# Altium PCB CH32F&V208R-R0-1v1.PcbDoc (part 1 of 3)
Units mil, origin at the board's own origin, x right, y up, seen from the top; angles counter-clockwise.
Board outline 3405.51 x 3740.16 mil, 2 copper layers (Top Layer, Bottom Layer); 61 components, 89 nets, 339 pads, 976 vias.
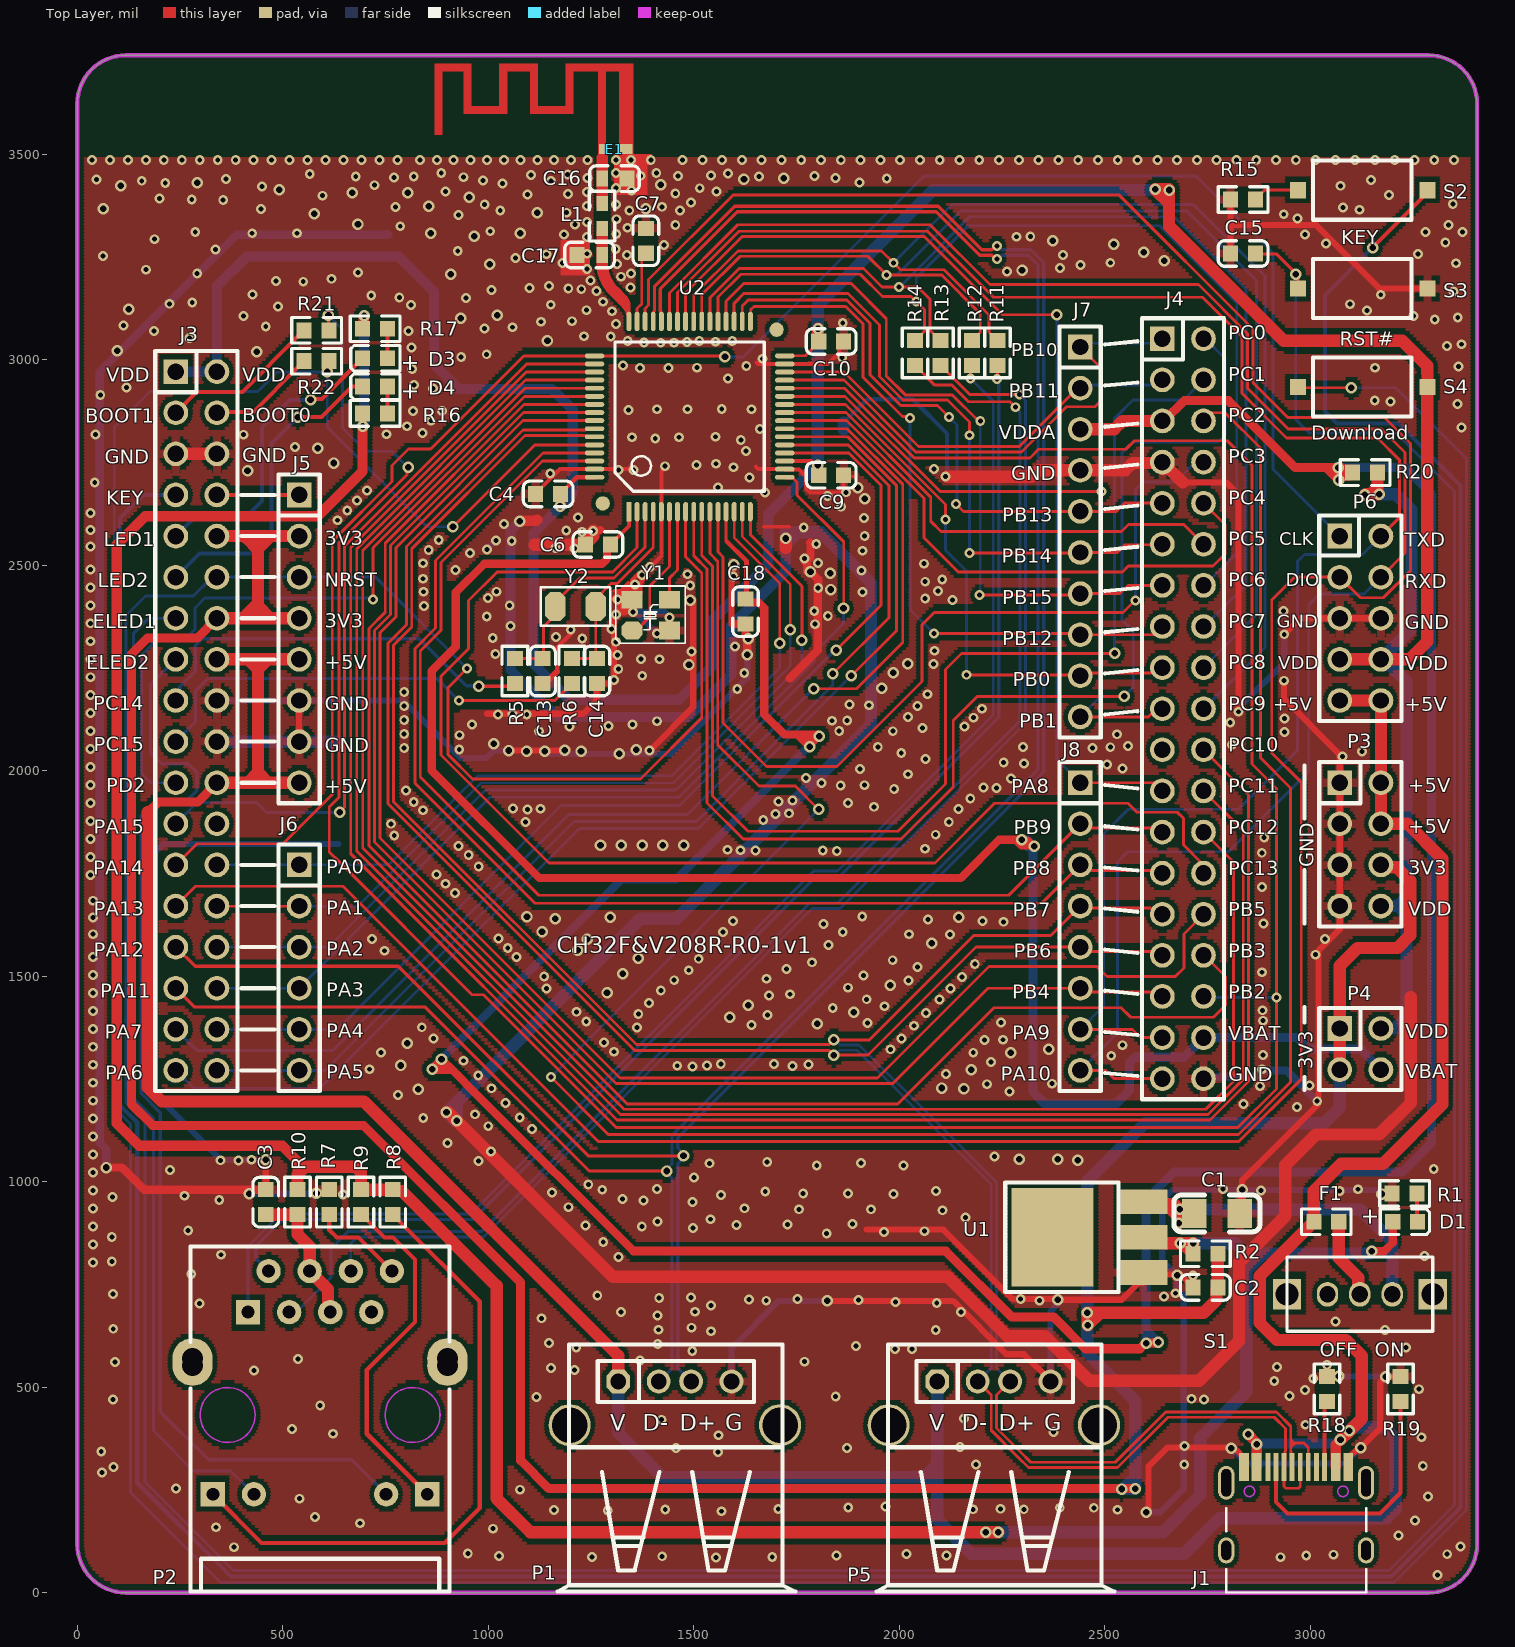
[diagram p0: Top Layer view]
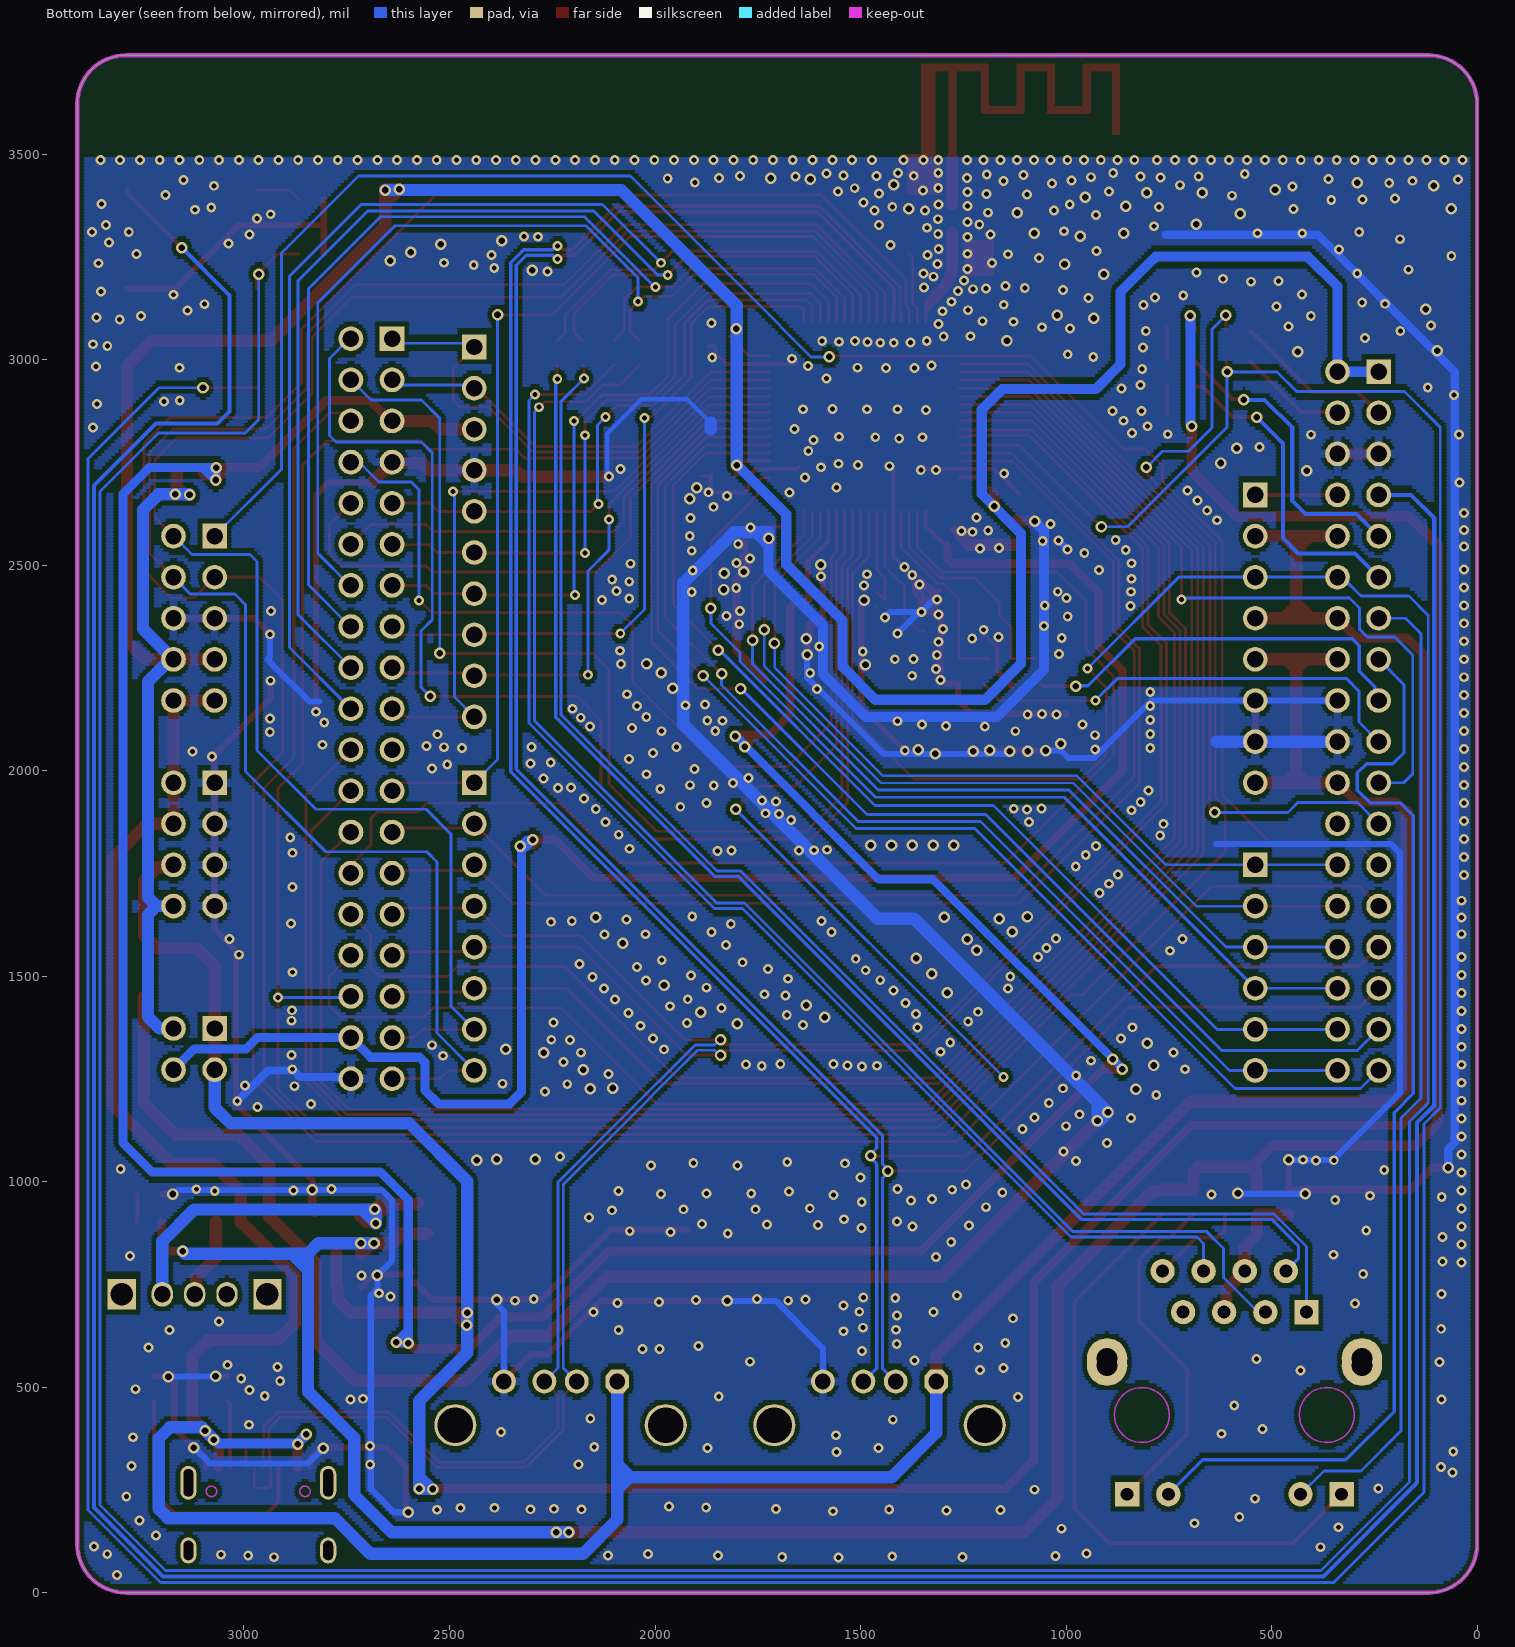
[diagram p1: Bottom Layer view, seen from below]

## Layer stack, top to bottom
Top Solder: solder mask 0.4, Solder Resist, Dk 3.5
Top Layer: signal copper 1.4
Dielectric 1: dielectric 12.6, FR-4, Dk 4.8
Bottom Layer: signal copper 1.4
Bottom Solder: solder mask 0.4, Solder Resist, Dk 3.5

## Board outline
0,118.11 ccw(c118.11,118.11) 118.11,0 3287.4,0 ccw(c3287.4,118.11) 3405.51,118.11 3405.51,3622.05 ccw(c3287.4,3622.05) 3287.4,3740.16 118.11,3740.16 ccw(c118.11,3622.05) 0,3622.05

## Design rules (kind name [scope] priority, off if disabled: settings)
Clearance Clearance_2 [InNet('ANT') or InNet('NetC16_2')] p1: gap=6 ignorepadtopadclearanceinfootprint=FALSE
Clearance Clearance_1 [InPolygon] p2: gap=10 ignorepadtopadclearanceinfootprint=FALSE
Clearance [All] p3: gap=6 ignorepadtopadclearanceinfootprint=FALSE except(8: Arc-Via Track-Via)
ComponentClearance [All] p1 off: gap=10 collisioncheckmode=3 verticalgap=10 showdistances=FALSE
DiffPairsRouting [All] p1: maxlimit=10 minlimit=6 mostfreqgap=6 toplayer_minwidth=5 toplayer_maxwidth=15 toplayer_prefwidth=8 bottomlayer_minwidth=5 bottomlayer_maxwidth=15 bottomlayer_prefwidth=8 maxuncoupledlength=500
MinimumSolderMaskSliver [All] p1 off: minsoldermaskwidth=10
PolygonConnect PolygonConnect_1 [IsVia] p1: connectstyle=Direct reliefconductorwidth=10 reliefentries=4 polygonreliefangle="90 Angle" airgapwidth=10
PolygonConnect [All] p2: connectstyle=Relief reliefconductorwidth=20 reliefentries=4 polygonreliefangle="90 Angle" airgapwidth=10
RoutingVias [All] p1: holewidth=16 width=28 viastyle="Through Hole" minholewidth=12 minwidth=24 maxholewidth=28 maxwidth=50
SilkToSilkClearance [All] p1 off: silktosilkclearance=10
SilkToSolderMaskClearance [IsPad] p1 off: minsilkscreentomaskgap=10 clearancetoexposedcopper=TRUE
SolderMaskExpansion [All] p1: expansion=4 istentingtop=FALSE
Width [All] p1: maxlimit=100 minlimit=6 preferedwidth=10
25 further rules are at their usual default settings.

## Classes and differential pairs
differential pair NewDifferentialPair2: +PB6 -PB7
differential pair NewDifferentialPair1: +PA11 -PA12

## Components (designator, comment, footprint, x,y, rotation, side; value= is the part's Value field where it differs from the comment)
C1 "10uF" 3216_C 2717.59,922.82 r180 top
C2 "10uF" 0603_C#1 2774.75,742.72 r180 top
C3 "1uF" 0603_C#1 458.47,980.52 r270 top
C4 "0.1uF" 0603_C#1 1175.75,2673.25 r180 top
C6 "0.1uF" 0603_C#1 1296.96,2550.22 r180 top
C7 "1uF" 0603_C#1 1383.28,3258.6 r90 top
C9 "0.1uF" 0603_C#1 1864.37,2718.39 r180 top
C10 "0.1uF" 0603_C#1 1864.37,3044.01 r180 top
C13 "12pF" 0603_C#1 1132.17,2212.01 r90 top
C14 "12pF" 0603_C#1 1264.31,2212.02 r90 top
C15 "0.1uF" 0603_C#1 2805.76,3258.02 r0 top
C16 "1.8pF" 0603_C#2 1337.26,3440.16 r180 top
C17 "1.8pF" 0603_C#2 1216.02,3254.21 r0 top
C18 "0.1uF" 0603_C#1 1625.64,2416.97 r270 top
D1 "power" 0603+ 3200.16,902.46 r0 top
D3 "RED" 0603+ 754.74,3003.01 r180 top
D4 "RED" 0603+ 754.74,2934.01 r180 top
E1 "ANTENNA" ANT-F-1-2.4G-1.6mmFR4 1276.83,3511.98 r0 top
F1 "500mA" 0603#1 3008.15,902.46 r0 top
J1 "TYPE-C-Receptacle-2.0" TYPE-C-Receptacle-2.0 2965.21,305.64 r0 top
J3 "Header 18X2" IDC36-2.54mm 239.76,2970.54 r0 top locked
J4 "Header 19X2" IDC38-2.54mm 2639.76,3050.54 r0 top
J5 "Header 8" SIP8-2.54mm 539.76,2670.54 r0 top locked
J6 "Header 6" SIP6-2.54MM 539.76,1770.54 r0 top locked
J7 "Header 10" SIP10-2.54mm 2439.76,3030.54 r0 top locked
J8 "Header 8" SIP8-2.54mm 2439.76,1970.54 r0 top locked
L1 "1.8nH" 0603#2 1276.63,3318.58 r90 top
P1 "USB" USBAF 1316.04,513.94 r0 top
P2 "HR911105A" HR911105A 415.37,682.53 r0 top
P3 "HEADER 4x2" IDC8-2.54mm 3071.43,1970.54 r0 top
P4 "Header 2X2" IDC4-2.54mm 3071.43,1372.54 r0 top
P5 "USB" USBAF 2092.04,513.94 r0 top
P6 "LINK" IDC10-2.54mm 3071.43,2170.53 r0 top
R1 "1K" 0603#1 3198.78,971.07 r0 top
R2 "0Ω" 0603#1 2774.75,824.53 r180 top
R5 "NC(0R)" 0603#1 1064.62,2212.01 r90 top
R6 "NC(0R)" 0603#1 1203.17,2212.01 r90 top
R7 "0Ω" 0603#1 612.97,980.52 r270 top
R8 "1K" 0603#1 767.48,980.52 r270 top
R9 "1K" 0603#1 690.23,980.52 r270 top
R10 "0Ω" 0603#1 535.72,919.89 r90 top
R11 "0Ω" 0603#1 2238.74,3046.64 r270 top
R12 "0Ω" 0603#1 2176.41,3046.64 r270 top
R13 "0Ω" 0603#1 2100.07,3046.64 r270 top
R14 "0Ω" 0603#1 2037.74,3046.64 r270 top
R15 "10K" 0603#1 2805.76,3389.32 r0 top
R16 "1K" 0603#1 694.11,2869.01 r0 top
R17 "1K" 0603#1 694.11,3075.01 r0 top
R18 "NC(5.1K)" 0603#1 3040.06,465.54 r90 top
R19 "NC(5.1K)" 0603#1 3219.21,465.54 r90 top
R20 "0Ω" 0603#1 3163.2,2724.84 r180 top
R21 "10K" 0603#1 612.37,3071.01 r180 top
R22 "10K" 0603#1 551.74,2996.01 r0 top
S1 "SW SPDT" SW1 3120.13,725.85 r180 top
S2 "KEY" SMD_6.1x3.65x2.5mm-KEY 3284.39,3412.01 r180 top
S3 "RST#" SMD_6.1x3.65x2.5mm-KEY 3284.39,3172.51 r180 top
S4 "Download" SMD_6.1x3.65x2.5mm-KEY 3284.39,2933.01 r180 top
U1 "1117-3.3V" SOT-223 2592.58,778.91 r90 top
U2 "CH32V208R" LQFP64M_10x10 1342.13,2629.87 r0 top
Y1 "32MHz" XT3225 1349.74,2341.01 r0 top
Y2 "32768Hz" FC-135 1162.74,2399.01 r0 top

## Footprints (in the part's own frame and the unit in brackets; to place one, negate y for a bottom-side part, rotate by r counter-clockwise, add the part's x,y. Pads: shape width x height; smd on the part's side, far side on the other; paste and mask are expansions set on the pad)
0603#1 [mm]
  rect 0.93x0.98 smd: 1(0,0) 2(1.54,0)
  silkscreen extent -0.76,-0.79 2.3,0.79
0603#2 [mm]
  rect 0.93x0.714 smd: 1(0,0) 2(1.54,0)
  silkscreen extent -0.76,-0.79 2.3,0.79
0603+ [mm]
  rect 0.93x0.98 smd: 1(0,0) 2(1.54,0)
  silkscreen extent -0.76,-0.79 2.27,0.79
0603_C#1 [mm]
  rect 0.93x0.98 smd: 1(0,0) 2(1.54,0)
  silkscreen extent -0.76,-0.79 2.31,0.79
0603_C#2 [mm]
  rect 0.93x0.98 smd: 1(0,0)
  rect 0.714x0.98 smd: 2(1.54,0)
  silkscreen extent -0.76,-0.79 2.31,0.79
3216_C [mil]
  rect 60x70 smd: 1(0,0) 2(-110,0)
  silkscreen extent -160,-45 50,45
ANT-F-1-2.4G-1.6mmFR4 [mm]
  rect 0.8x0.6 smd mask+0: 0(1.483,0)
  rect 0.4x0.6 smd mask+0: 1(0,0)
  Top Layer region: 0.24,5.027 -0.26,5.027 -0.26,-0.304 0.24,-0.304
  Top Layer region: 1.94,5.002 1.04,5.002 1.04,-0.304 1.94,-0.304
  Top Layer region: 1.94,5.296 -2.26,5.296 -2.26,4.796 1.94,4.796
  Top Layer region: -1.76,4.977 -2.26,4.977 -2.26,2.157 -1.76,2.157
  Top Layer region: -1.85,2.651 -4.39,2.651 -4.39,2.156 -1.85,2.156
  Top Layer region: -3.96,4.976 -4.46,4.976 -4.46,2.156 -3.96,2.156
  Top Layer region: -3.96,5.296 -6.36,5.296 -6.36,4.796 -3.96,4.796
  Top Layer region: -5.86,4.977 -6.36,4.977 -6.36,2.157 -5.86,2.157
  Top Layer region: -5.875,2.657 -8.364,2.657 -8.364,2.157 -5.875,2.157
  Top Layer region: -8.06,4.977 -8.56,4.977 -8.56,2.157 -8.06,2.157
  Top Layer region: -8.06,5.296 -10.36,5.296 -10.36,4.796 -8.06,4.796
  Top Layer region: -9.86,4.976 -10.36,4.976 -10.36,0.856 -9.86,0.856
FC-135 [mil]
  oct 50x70 smd: 1(0,0) 2(98.43,0)
  silkscreen extent -35,-47 133,47
HR911105A [mm]
  rect 1.5x1.5 hole 0.8: 1(0,0) 9(-2.175,-11.252) 12(11.075,-11.252)
  round 1.5 hole 0.8: 2(1.27,2.54) 3(2.54,0) 4(3.81,2.54) 5(5.08,0) 6(6.35,2.54) 7(7.62,0) 8(8.89,2.54) 10(0.365,-11.252) 11(8.535,-11.252)
  round 2.5 hole 1.3: ""(-3.43,-2.852) ""(-3.43,-3.3) ""(12.32,-3.3) ""(12.32,-2.852)
  Keep-Out Layer circle w0.1: c10.165,-6.352 r1.7
  Keep-Out Layer circle w0.1: c-1.265,-6.352 r1.7
  silkscreen extent -3.55,-17.27 12.45,4.06
IDC4-2.54mm [mil]
  rect 60x60 hole 40: 1(0,0)
  round 60 hole 40: 2(100,0) 3(0,-100) 4(100,-100)
  silkscreen extent -50,-150 150,50
IDC8-2.54mm [mil]
  rect 60x60 hole 40: 1(0,0)
  round 60 hole 40: 2(100,0) 3(0,-100) 4(100,-100) 5(0,-200) 6(100,-200) 7(0,-300) 8(100,-300)
  silkscreen extent -50,-350 150,50
IDC10-2.54mm [mil]
  rect 60x60 hole 40: 1(0,400)
  round 60 hole 40: 2(100,400) 3(0,300) 4(100,300) 5(0,200) 6(100,200) 7(0,100) 8(100,100) 9(0,0) 10(100,0)
  silkscreen extent -50,-50 150,450
IDC36-2.54mm [mil]
  rect 60x60 hole 40: 1(0,0)
  round 60 hole 40: 2(100,0) 3(0,-100) 4(100,-100) 5(0,-200) 6(100,-200) 7(0,-300) 8(100,-300) 9(0,-400) 10(100,-400) 11(0,-500) 12(100,-500) 13(0,-600) 14(100,-600) 15(0,-700) 16(100,-700) 17(0,-800) 18(100,-800) 19(0,-900) 20(100,-900) 21(0,-1000) 22(100,-1000) 23(0,-1100) 24(100,-1100) 25(0,-1200) 26(100,-1200) 27(0,-1300) 28(100,-1300) 29(0,-1400) 30(100,-1400) 31(0,-1500) 32(100,-1500) 33(0,-1600) 34(100,-1600) 35(0,-1700) 36(100,-1700)
  silkscreen extent -50,-1750 150,50
IDC38-2.54mm [mil]
  rect 60x60 hole 40: 1(0,0)
  round 60 hole 40: 2(100,0) 3(0,-100) 4(100,-100) 5(0,-200) 6(100,-200) 7(0,-300) 8(100,-300) 9(0,-400) 10(100,-400) 11(0,-500) 12(100,-500) 13(0,-600) 14(100,-600) 15(0,-700) 16(100,-700) 17(0,-800) 18(100,-800) 19(0,-900) 20(100,-900) 21(0,-1000) 22(100,-1000) 23(0,-1100) 24(100,-1100) 25(0,-1200) 26(100,-1200) 27(0,-1300) 28(100,-1300) 29(0,-1400) 30(100,-1400) 31(0,-1500) 32(100,-1500) 33(0,-1600) 34(100,-1600) 35(0,-1700) 36(100,-1700) 37(0,-1800) 38(100,-1800)
  silkscreen extent -50,-1850 150,50
LQFP64M_10x10 [mm]
  round 0.889 smd: 0(-1.619,0.508) 0(9.119,11.246)
  rect 0.3x1.2 smd mask+0.051: 1(0,0)
  oval 0.3x1.2 smd mask+0.051: 2(0.5,0) 3(1,0) 4(1.5,0) 5(2,0) 6(2.5,0) 7(3,0) 8(3.5,0) 9(4,0) 10(4.5,0) 11(5,0) 12(5.5,0) 13(6,0) 14(6.5,0) 15(7,0) 16(7.5,0) 33(7.5,11.754) 34(7,11.754) 35(6.5,11.754) 36(6,11.754) 37(5.5,11.754) 38(5,11.754) 39(4.5,11.754) 40(4,11.754) 41(3.5,11.754) 42(3,11.754) 43(2.5,11.754) 44(2,11.754) 45(1.5,11.754) 46(1,11.754) 47(0.5,11.754) 48(0,11.754)
  oval 1.2x0.3 smd mask+0.051: 17(9.627,2.127) 18(9.627,2.627) 19(9.627,3.127) 20(9.627,3.627) 21(9.627,4.127) 22(9.627,4.627) 23(9.627,5.127) 24(9.627,5.627) 25(9.627,6.127) 26(9.627,6.627) 27(9.627,7.127) 28(9.627,7.627) 29(9.627,8.127) 30(9.627,8.627) 31(9.627,9.127) 32(9.627,9.627) 49(-2.127,9.627) 50(-2.127,9.127) 51(-2.127,8.627) 52(-2.127,8.127) 53(-2.127,7.627) 54(-2.127,7.127) 55(-2.127,6.627) 56(-2.127,6.127) 57(-2.127,5.627) 58(-2.127,5.127) 59(-2.127,4.627) 60(-2.127,4.127) 61(-2.127,3.627) 62(-2.127,3.127) 63(-2.127,2.627) 64(-2.127,2.127)
  silkscreen extent -0.86,1.26 8.37,10.49
SIP6-2.54MM [mil]
  rect 60x60 hole 40: 1(0,0)
  round 60 hole 40: 2(0,-100) 3(0,-200) 4(0,-300) 5(0,-400) 6(0,-500)
  silkscreen extent -50,-550 50,50
SIP8-2.54mm [mil]
  rect 60x60 hole 40: 1(0,0)
  round 60 hole 40: 2(0,-100) 3(0,-200) 4(0,-300) 5(0,-400) 6(0,-500) 7(0,-600) 8(0,-700)
  silkscreen extent -50,-750 50,50
SIP10-2.54mm [mil]
  rect 60x60 hole 40: 1(0,0)
  round 60 hole 40: 2(0,-100) 3(0,-200) 4(0,-300) 5(0,-400) 6(0,-500) 7(0,-600) 8(0,-700) 9(0,-800) 10(0,-900)
  silkscreen extent -50,-950 50,50
SMD_6.1x3.65x2.5mm-KEY [mm]
  rect 1x1 smd: 1(0,0) 2(8,0)
  silkscreen extent 0.98,-1.83 7.08,1.83
SOT-223 [mil]
  rect 60x120 smd: 1(0,0) 2(86,0) 3(172,0)
  rect 240x200 smd: ""(86,220)
  silkscreen extent -47,60 219,335
SW1 [mm]
  rect 1.75x1.9 hole 1.4: 0(-4.5,0) 0(4.5,0)
  oval 1.321x1.524 hole 1.016: 1(0,0) 2(-2,0) 3(2,0)
  silkscreen extent -4.51,-2.31 4.5,2.29
TYPE-C-Receptacle-2.0 [mm]
  oval 1x1.6 hole 0.6 slot 1.2 at 90 deg mask+0.051: 0(-4.32,-5.15) 0(4.32,-5.15)
  oval 1x2.1 hole 0.6 slot 1.7 at 90 deg mask+0.051: 0(-4.32,-0.97) 0(4.32,-0.97)
  rect 0.6x1.75 smd mask+0.051: A1(-3.225,0) A4(-2.45,0) B1(3.225,0) B4(2.45,0)
  rect 0.3x1.75 smd mask+0.051: A5(-1.25,0) A6(-0.25,0) A7(0.25,0) A8(1.25,0) B5(1.75,0) B6(0.75,0) B7(-0.75,0) B8(-1.75,0)
  Keep-Out Layer circle w0.1: c-2.89,-1.5 r0.325
  Keep-Out Layer circle w0.1: c2.89,-1.5 r0.325
  silkscreen extent -4.32,-7.75 4.32,-2.55
USBAF [mm]
  round 2.6 hole 2.2: 0(-3,-2.7) 0(10,-2.7)
  oct 1.473x1.473 hole 0.965: 1(0,0)
  round 1.473 hole 0.965: 2(2.5,0) 3(4.5,0) 4(7,0)
  silkscreen extent -3.75,-12.99 10.95,2.29
XT3225 [mm]
  oct 1.3x1.1 smd: 1(0,0)
  rect 1.3x1.1 smd: 2(2.3,0) 3(2.3,1.9) 4(0,1.9)
  silkscreen extent -1.02,-0.8 3.27,2.74

## Part data
C1 C2 C3 C4 C6 C7 C9 C10 C13 C14 C15 C16 C17 C18: library part CAP, "Capacitor"
D1 D3 D4: library part LED0, "Typical INFRARED GaAs LED", LatestRevisionDate=08-Jul-2005, LatestRevisionNote="Mech Layer 1 removed.", PackageDescription="LED; 2 Leads", PackageReference=LED-0, Published=8-Jun-2000, Publisher="Altium Limited"
E1: "Generic Antenna"
F1: library part FUSE1, "Fuse"
J1: "Type-C USB2.0 母座"
J3: "Header, 18-Pin, Dual row", LatestRevisionDate=17-Jul-2002, LatestRevisionNote="Re-released for DXP Platform.", Publisher="Altium Limited"
J4: "Header, 19-Pin, Dual row", LatestRevisionDate=17-Jul-2002, LatestRevisionNote="Re-released for DXP Platform.", Publisher="Altium Limited"
J5 J8: "Header, 8-Pin", LatestRevisionDate=17-Jul-2002, LatestRevisionNote="Re-released for DXP Platform.", Publisher="Altium Limited"
J6: "Header, 6-Pin", LatestRevisionDate=17-Jul-2002, LatestRevisionNote="Re-released for DXP Platform.", Publisher="Altium Limited"
J7: "Header, 10-Pin", LatestRevisionDate=17-Jul-2002, LatestRevisionNote="Re-released for DXP Platform.", Publisher="Altium Limited"
L1: library part INDUCTOR
P1 P5: "USB Port"
P3: "Header, 4-Pin, Dual row"
P4: "Header, 2-Pin, Dual row", LatestRevisionDate=17-Jul-2002, LatestRevisionNote="Re-released for DXP Platform.", Publisher="Altium Limited"
P6: library part "Header 5X2H", "Header, 5-Pin, Dual row, Right Angle", LatestRevisionDate=17-Jul-2002, LatestRevisionNote="Re-released for DXP Platform.", Publisher="Altium Limited"
R1 R2 R5 R6 R7 R8 R9 R10 R11 R12 R13 R14 R15 R16 R17 R18 R19: library part RES
R20: library part R
R21 R22: library part Res2, "Resistor"
S2 S3 S4: library part KEY1
U2: "RISC-V BLE5.3 MCU, 10M Ethernet, 2*USB, CAN"
Y1 Y2: library part XTAL, "Crystal Oscillator", LatestRevisionDate=17-Jul-2002, LatestRevisionNote="Re-released for DXP Platform.", PackageDescription="Crystal, Thru-Hole; 2 Leads; Body 3.1 x 8.2 mm (Dia.xH)", PackageReference=R38, Published=8-Jun-2000, Publisher="Altium Limited"

## Via types
v1: diameter 24, hole 12, Top Layer to Bottom Layer, tented both sides, 809 vias
v2: diameter 28, hole 16, Top Layer to Bottom Layer, tented both sides, 167 vias

## Nets (pads, with @x,y where several pads share a name; then routed paths per layer and width w, separated by ;. In a path a pad name is that pad's centre, name@x,y a point inside that pad or via, vN(x,y) a via of type N, cw(c..) or ccw(c..) an arc to the next point about the centre after c; other vN are vias at no path point)
3V3: C2.1 J3.10 J3.14 J5.2 J5.4 P3.6 P4.1 P4.3 R2.1 | length 8020.2
  Top Layer w22: J3.14@339.76,2370.54 291.54,2322.32 170.33,2322.32 131.53,2283.52 131.53,1188.92 183.35,1137.1 696.07,1137.1 1078.46,754.71 1078.46,321.93 1147.27,253.12 2540.61,253.12 v2(2573.82,253.12)
  Top Layer w30: J3.14@339.76,2370.54 410.54,2370.54 439.76,2370.54 ; J3.10@339.76,2570.54 410.54,2570.54 439.76,2570.54 ; 410.54,2376.35 410.54,2377.48 439.76,2406.71 ; 410.54,2566.6 411.12,2566.6 439.76,2537.96 ; 466.97,2567.03 439.76,2539.82 ; J5.4@539.76,2370.54 469.53,2370.54 ; J5.2@539.76,2570.54 466.97,2570.54 439.76,2570.54 ; v2@2456.87,676.67 2457.91,675.64 v2(2457.91,650.94) 2487.77,680.8 ; v2(2457.02,680.8) 2487.77,680.8 ; R2.1@2774.75,824.53 C2.1@2774.75,742.72 2771.45,739.42 2771.45,712.27 2739.98,680.8 2487.77,680.8 ; P4.3@3071.43,1272.54 P4.1@3071.43,1372.54 3071.43,1472.54 3071.43,1525.45 3114.57,1568.59 3211.65,1568.59 3242.8,1599.73 3242.8,1731.63 3209.62,1764.8 3177.17,1764.8 P3.6@3171.43,1770.54 ; 439.76,2370.54 469.53,2370.54 ; 439.76,2370.54 439.76,2400.31 ; 439.76,2400.31 439.76,2406.71 ; 439.76,2400.31 469.53,2370.54 ; 439.76,2406.71 439.76,2537.96 ; 439.76,2537.96 439.76,2539.82 ; 439.76,2539.82 439.76,2570.54
  Bottom Layer w30: v2(2540.61,252.28) v2@2543.95,252.28 ; v2@2570.84,252.97 2570.14,252.28 v2@2543.95,252.28 ; v2(2573.82,253.12) 2573.82,282.15 ; P4.3@3071.43,1272.54 3071.43,1180.71 3032.88,1142.16 2597.89,1142.16 2457.02,1001.3 v2(2457.02,680.8) 2457.02,650.94 2457.02,583 2573.82,466.2 2573.82,282.15 ; v2@2543.95,252.28 2573.82,282.15
3V3S: D1.1 R2.2 R8.1 R9.1 R10.2 R16.1 R17.1 U1.2 | length 7539.5
  Top Layer w20: v2(3148.66,830.62) 3179.4,830.62 3200.16,851.38 D1.1@3200.16,902.46
  Top Layer w25: 535.72,1018.41 535.72,1040.76 535.72,1050.1 ; 545.06,1040.76 535.72,1050.1 ; v2(694.11,2837.91) 694.11,2727.78 585.36,2619.04 165.67,2619.04 95.98,2549.35 95.98,1142.31 150.77,1087.52 498.3,1087.52 535.72,1050.1 ; R17.1@694.11,3075.01 697.05,3077.95 697.05,3105.46 v2(697.62,3106.04)
  Top Layer w30: R10.2@535.72,980.52 535.72,1018.41 553.3,1035.98 677.05,1035.98 690.23,1022.8 R9.1@690.23,980.52 R8.1@767.48,980.52 770.78,977.21 789.38,977.21 1020.19,746.4 1020.19,229.31 1102.32,147.19 v2(2210.28,147.19) 2239.97,147.19 v2(2240.14,147.03) ; U1.2@2553.62,873.66 2627.5,873.66 2627.5,859.98 2637.58,849.91 v2@2689.73,849.91 ; v2@2689.73,849.91 2714.83,849.91 v2(2715.32,850.4) 2715.32,825.73 R2.2@2714.12,824.53 2714.12,825.51 2710.82,828.82 v2@2689.73,849.91
  Bottom Layer w25: v2(694.11,2837.91) 694.11,2838.72 697.62,2842.23 v2(697.62,3106.04)
  Bottom Layer w30: v2(2210.28,147.19) 2640.89,147.19 2731.95,238.25 2731.95,376.89 2844.15,489.09 2844.15,784.5 ; v2(2683.68,850) 2684.09,850.4 v2(2715.32,850.4) 2818.27,850.4 2844.15,824.53 ; v2(3148.66,830.62) 3142.57,824.53 2884.17,824.53 ; 2844.15,784.5 2844.15,824.53 ; 2844.15,784.5 2884.17,824.53 ; 2844.15,824.53 2884.17,824.53
+5V: F1.1 J1.A4 J1.B4 J3.16 J3.22 J5.5 J5.8 P1.1 P3.2 P3.4 P5.1 P6.9 P6.10 | length 8997.5
  Top Layer w22: 171.53,1898.38 196.69,1923.54 292.76,1923.54 J3.22@339.76,1970.54
  Top Layer w25: v2(2848.28,385.5) 2868.76,365.03 J1.A4@2868.76,305.64 2869.14,306.02 2869.14,361.27 v2(2869.52,361.65) ; J1.B4@3061.67,305.64 3061.67,359.81 3073.05,371.19 v2(3073.05,372)
  Top Layer w30: 171.53,1898.38 171.53,1229.07 205.47,1195.13 697.4,1195.13 1316.04,576.49 P1.1@1316.04,513.94 ; J3.22@339.76,1970.54 415.19,1970.54 ; J3.16@339.76,2270.54 416.38,2270.54 ; J5.8@539.76,1970.54 464.33,1970.54 ; J5.5@539.76,2270.54 463.14,2270.54 ; P6.9@3071.43,2170.53 P6.10@3171.43,2170.53 P3.2@3171.43,1970.54 P3.4@3171.43,1870.54 3235.77,1870.54 3321.08,1785.24 3321.08,1188.18 3176.19,1043.3 3074.13,1043.3 3008.15,977.32 3008.15,901.48 3004.85,898.17 3003.86,898.17 2876.24,770.55 2876.24,656.88 2918.18,614.95 3086.06,614.95 3125.16,575.85 3125.16,424.11 v2(3094.78,393.73) v2(3073.05,372) ; 415.19,1970.54 439.76,1970.54 ; 415.19,1970.54 439.76,1995.11 ; 416.38,2270.54 439.76,2270.54 ; 416.38,2270.54 439.76,2247.16 ; 439.76,1970.54 464.33,1970.54 ; 439.76,1970.54 439.76,1995.11 ; 439.76,1995.11 439.76,2247.16 ; 439.76,1995.11 464.33,1970.54 ; 439.76,2247.16 463.14,2270.54 ; 439.76,2247.16 439.76,2270.54 ; 439.76,2270.54 463.14,2270.54
  Bottom Layer w25: v2(2848.28,385.5) 2848.28,384.69 2869.99,362.98 v2@2869.99,359.82 ; v2@2870.91,362.23 2872.21,362.23 2872.99,363 3063.23,363 v2@3072.23,372
  Bottom Layer w30: P1.1@1316.04,513.94 1316.04,389.29 1424.75,280.59 2059.36,280.59 ; P5.1@2092.04,513.94 2092.04,313.27 ; v2@3072.23,372 3102.85,402.62 3180.17,402.62 3207.13,375.66 3207.13,203.26 3185.19,181.32 2779.17,181.32 2692.25,94.4 2175.38,94.4 2092.04,177.74 2092.04,251.27 ; 2059.36,280.59 2062.72,280.59 ; 2059.36,280.59 2092.04,313.27 ; 2062.72,280.59 2092.04,280.59 ; 2062.72,280.59 2092.04,251.27 ; 2092.04,251.27 2092.04,280.59 ; 2092.04,280.59 2092.04,313.27
ANT: C17.2 L1.1 U2.48 | length 397.6
  Top Layer w8: C17.2@1276.65,3244.87 C17.2@1276.65,3254.21 ; 1317.42,3140.2 1325.97,3131.65 cw(c1286.94,3092.62) U2.48@1342.13,3092.62 U2.48@1342.13,3106.68 ; 1324.77,3140.63 1330.79,3134.61 cw(c1317.62,3121.43) 1336.25,3121.43 ; 1325.89,3145.9 cw(c1286.67,3106.68) U2.48@1342.13,3106.68 ; 1329.97,3149.92 cw(c1300.61,3120.56) 1342.13,3120.56 ; 1332.83,3153.19 cw(c1310.35,3130.71) 1342.13,3130.71 1342.13,3120.56 ; U2.48@1342.13,3106.68 1342.13,3120.56
  Top Layer w28.1: C17.2@1276.65,3244.87 1276.65,3236.56 ccw(c1376.65,3236.56) 1305.93,3165.85 1325.89,3145.9 ; C17.2@1276.65,3254.21 L1.1@1276.65,3309.58
BOOT0: R22.2 S4.2 U2.60 | length 10630
  Top Layer w7: v2(608.16,2969.83) 608.16,2991.8 R22.2@612.37,2996.01 ; v2(913.94,2593.26) 1113.03,2792.35 U2.60@1258.39,2792.35 ; S4.2@2969.43,2933.01 2971.12,2931.32 v2(3099.68,2931.32)
  Bottom Layer w7: v2(913.94,2593.26) 851,2593.26 608.16,2836.1 v2(608.16,2969.83) 486.84,2969.83 438.88,2921.87 176.61,2921.87 89.84,2835.1 89.84,1179.71 129.13,1140.42 129.13,244.44 348.71,24.86 3203.2,24.86 3379.4,201.06 3379.4,2758.68 3206.76,2931.32 v2(3099.68,2931.32)
BOOT1: J4.34 R21.1 U2.28 | length 7129.7
  Top Layer w7: v2(611.11,3107.73) 611.11,3072.28 R21.1@612.37,3071.01 ; v2(804.69,2737.69) 801.93,2734.94 801.93,2719.8 637.09,2554.96 637.09,1935.54 612.9,1911.34 612.9,1802.32 637.09,1778.13 960.4,1454.82 987.99,1454.82 1311.29,1131.52 2822.94,1131.52 2917,1225.58 v1(2917,1448) 2917,1956.77 2857.47,2016.3 2857.47,2742.66 2797.58,2802.55 2571.64,2802.55 2550.68,2781.6 2338.74,2781.6 2317.37,2760.23 2036.26,2760.23 1866.35,2930.14 U2.28@1721.15,2930.14
  Bottom Layer w7: v2(611.11,3107.73) 645.45,3073.39 645.45,2833.57 702.2,2776.82 765.55,2776.82 v2(804.69,2737.69) ; J4.34@2739.76,1450.54 2742.66,1447.64 2916.64,1447.64 v1(2917,1448)
CC1: J1.A5 R19.1 | length 642.8
  Top Layer w10: J1.A5@2916,305.64 2916,220.92 2944.12,192.79 3168.78,192.79 3219.21,243.22 R19.1@3219.21,465.54
CC2: J1.B5 R18.1 | length 162.4
  Top Layer w10: J1.B5@3034.11,305.64 3034.11,459.59 R18.1@3040.06,465.54
ELED1: J3.13 P2.10 | length 2395.5
  Top Layer w7: P2.10@420.94,239.53 P2.10@429.74,239.53
  Bottom Layer w7: J3.13@239.76,2370.54 174.04,2370.54 136.36,2332.86 136.36,1203.75 185.19,1154.91 185.19,393.81 282.65,296.35 372.92,296.35 P2.10@429.74,239.53
ELED2: J3.15 P2.11 | length 2691.1
  Bottom Layer w8: J3.15@239.76,2270.54 177.94,2208.72 177.94,2043.76 205.27,2016.43 269.14,2016.43 291.35,1994.22 291.35,1952.31 260.43,1921.38 186.79,1921.38 155.56,1890.15 155.56,1214.5 201.97,1168.08 201.97,440.79 319.53,323.23 667.7,323.23 P2.11@751.39,239.53
ERXN: P2.6 R13.2 | length 3259.9
  Top Layer w7: R13.2@2100.07,2986.01 2101.06,2986.01 2115.86,2971.21 2115.86,2970.22 2171.09,2915 v1(2292,2915)
  Bottom Layer w7: P2.6@665.37,782.53 665.37,849.5 681.19,865.32 988.23,865.32 1787.43,1664.52 1855.37,1664.52 2306.58,2115.72 2306.58,2900.42 v1(2292,2915)
ERXP: P2.3 R14.2 | length 3470.5
  Top Layer w7: R14.2@2037.74,2986.01 2038.72,2986.01 2053.53,2971.21 2053.53,2970.22 2086.16,2937.6 2127.56,2937.6 2167.88,2897.28 2268.72,2897.28 v1(2282,2884)
  Bottom Layer w7: P2.3@515.37,682.53 525.33,692.49 543.07,692.49 617.04,766.46 617.04,837.46 657.9,878.32 982.85,878.32 1782.05,1677.52 1849.99,1677.52 2293.58,2121.11 2293.58,2872.42 v1(2282,2884)
ETXN: P2.2 R11.2 | length 3272
  Top Layer w8: v1(2237.74,2953.01) 2238.74,2954.01 R11.2@2238.74,2986.01
  Bottom Layer w8: P2.2@465.37,782.53 434.43,813.46 434.43,842.53 500.04,908.14 962.78,908.14 1797.17,1742.52 1855.08,1742.52 2241.83,2129.28 2241.83,2941.5 2240.8,2942.53 2240.8,2949.95 v1(2237.74,2953.01)
ETXP: P2.1 R12.2 | length 3384
  Top Layer w7: v1(2172.68,2954.07) 2172.68,2982.29 R12.2@2176.41,2986.01
  Bottom Layer w7: P2.1@415.37,682.53 415.37,842.56 494.45,921.64 957.19,921.64 1791.57,1756.02 1849.48,1756.02 2228.33,2134.87 2228.33,2898.42 v1(2172.68,2954.07)